# EAGLE board transmitter (EAGLE 7.4.0)
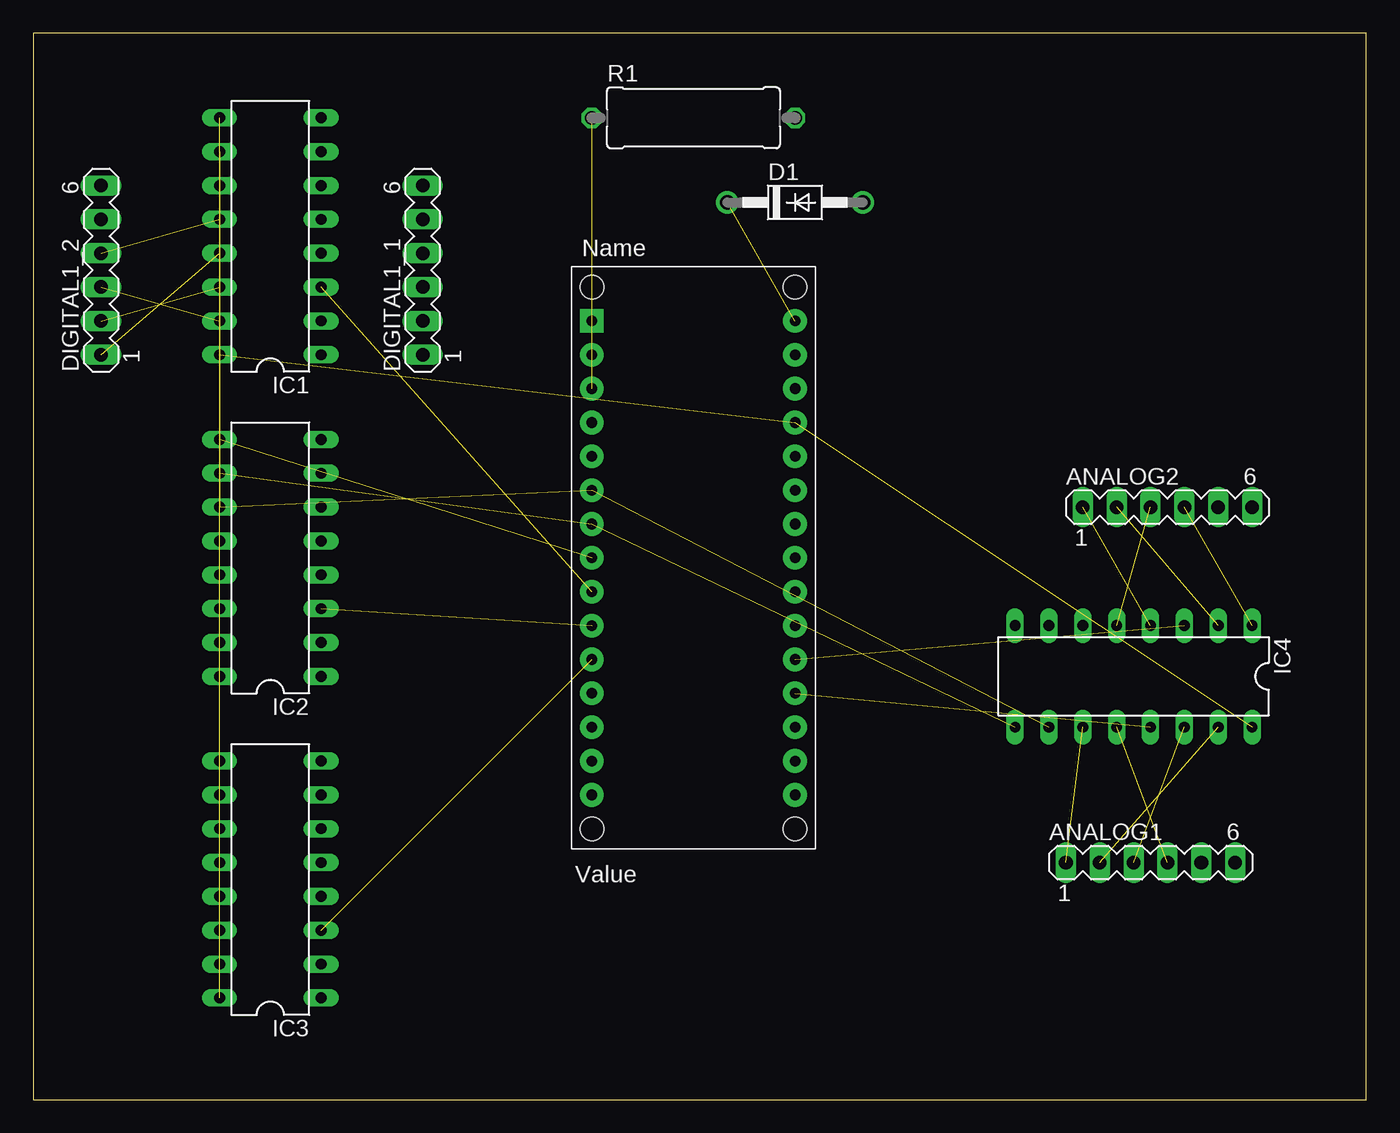
[diagram p0: board, top side]
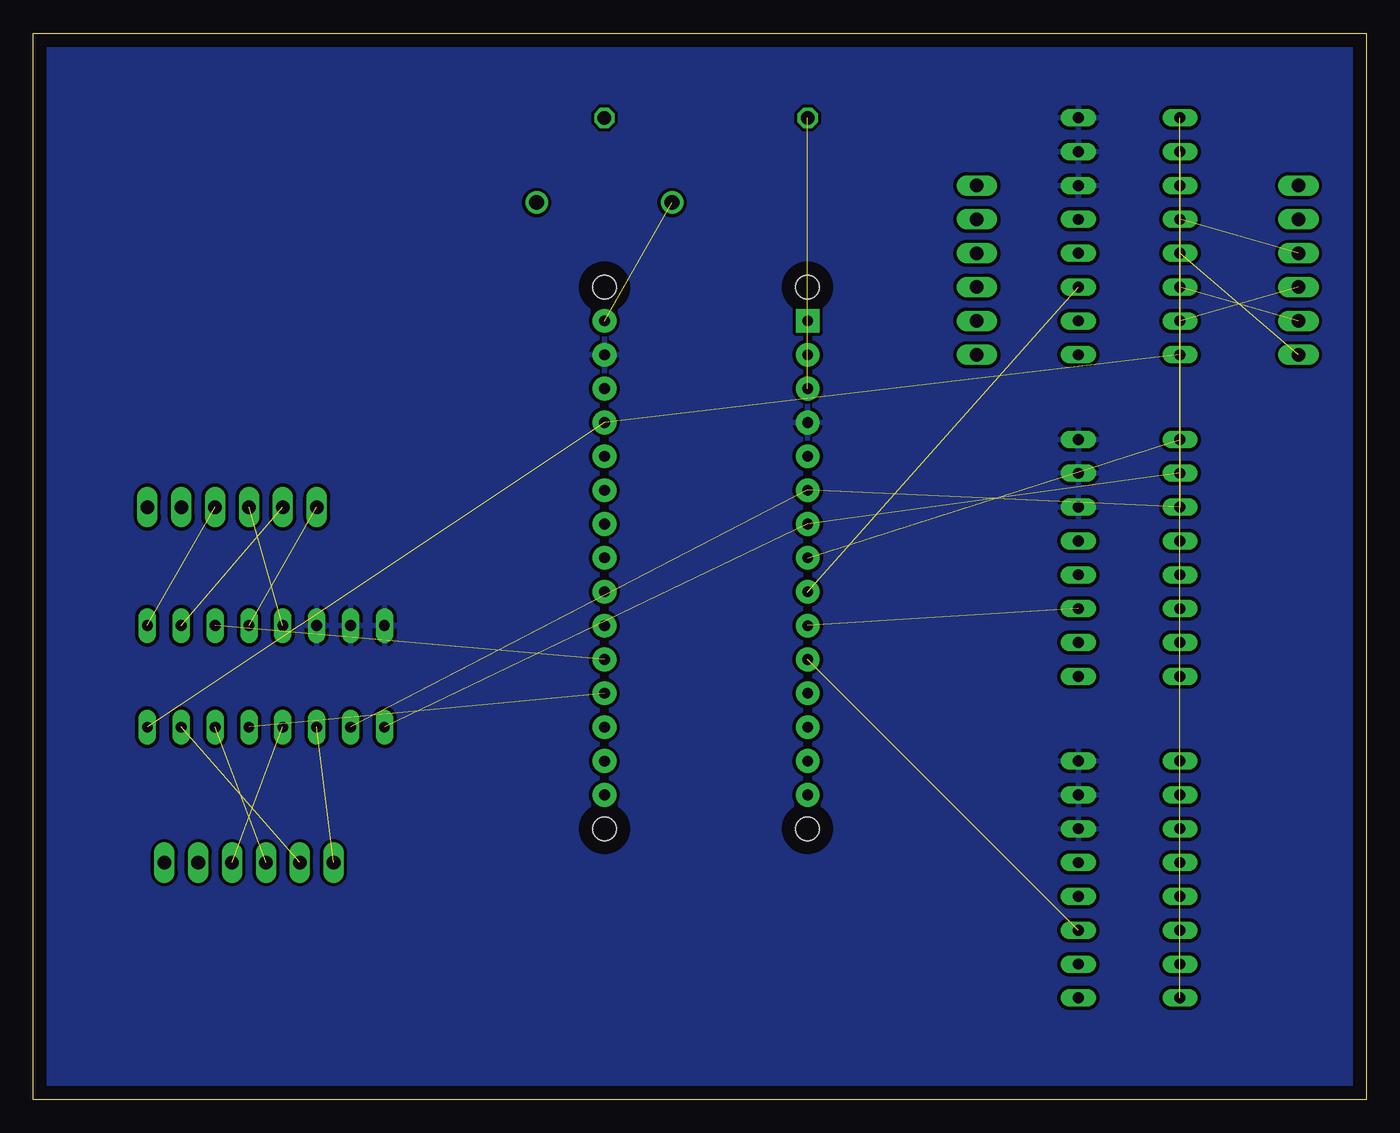
[diagram p1: board, bottom side, seen from below]

Size 100 x 80 mm. Coordinates in mm from the lower left corner, seen from the top.
Outline: 0,0 100,0 100,80 0,80 0,0
Copper layers (1*16): Top 0.035mm / dielectric 1.5mm / Bottom 0.035mm
Design rules "default": minimum track width 10mil, minimum drill 24mil, track to track 8mil, track to pad 8mil, pad to pad 8mil, via to via 8mil, smd to smd 8mil, copper to edge 40mil, drill to drill 8mil, minimum pad ring 10mil, minimum via ring 8mil, stop-mask expansion 4mil, vias tented up to drill 0mil, thermal gap 10mil
Net classes: 0 default: width 1.27 mm, drill 0.25 mm, clearance 0.25 mm

## Footprints (pad centres in the part's own frame; a part is rotated, then mirrored left to right if it is on the bottom)
MA06-1 = drill 1.016 long: 1 -6.35,0; 2 -3.81,0; 3 -1.27,0; 4 1.27,0; 5 3.81,0; 6 6.35,0
DO41-10 = drill 1.118: A 5.08,0; C -5.08,0
DIL16 = drill 0.813 long: 1 -8.89,-3.81; 2 -6.35,-3.81; 3 -3.81,-3.81; 4 -1.27,-3.81; 5 1.27,-3.81; 6 3.81,-3.81; 7 6.35,-3.81; 8 8.89,-3.81; 9 8.89,3.81; 10 6.35,3.81; 11 3.81,3.81; 12 1.27,3.81; 13 -1.27,3.81; 14 -3.81,3.81; 15 -6.35,3.81; 16 -8.89,3.81
P0613/15 = drill 1.016 octagon: 1 -7.62,0; 2 7.62,0
PDIP-32 = drill 0.8 pad 1.778: 3V3 15.24,-35.56; +5V 15.24,-10.16; A0 15.24,-12.7; A1 15.24,-15.24; A2 15.24,-17.78; A3 15.24,-20.32; A4 15.24,-22.86; A5 15.24,-25.4; A6 15.24,-27.94; A7 15.24,-30.48; AREF 15.24,-33.02; D0/RX 0,-5.08; D2 0,-12.7; D3 0,-15.24; D4 0,-17.78; D5 0,-20.32; D6 0,-22.86; D7 0,-25.4; D8 0,-27.94; D9 0,-30.48; D10 0,-33.02; D11 0,-35.56; D12 0,-38.1; D13 15.24,-38.1; GND 0,-10.16; GND1 15.24,-5.08; RESET 0,-7.62; RESET1 15.24,-7.62; VIN 15.24,-2.54 | drill 0.8 pad 1.778 square: D1/TX 0,-2.54 | hole 1.778: 0,0; 0,-40.64; 15.24,-40.64; 15.24,0

## Placement (x,y rotation side)
ANALOG1  [MA06-1]  83.82,17.78 0 top
ANALOG2  [MA06-1]  85.09,44.45 0 top
D1  1N4004  [DO41-10]  57.15,67.31 0 top
DIGITAL1_1  [MA06-1]  29.21,62.23 90 top
DIGITAL1_2  [MA06-1]  5.08,62.23 90 top
IC1  4051N  [DIL16]  17.78,64.77 90 top
IC2  4051N  [DIL16]  17.78,40.64 90 top
IC3  4051N  [DIL16]  17.78,16.51 90 top
IC4  4052N  [DIL16]  82.55,31.75 180 top
R1  [P0613/15]  49.53,73.66 0 top
U$1  ARDUINONANO  [PDIP-32]  41.91,60.96 0 top

## Library data of the parts
ANALOG1 ANALOG2 DIGITAL1_1 DIGITAL1_2 = con-lstb; OC_FARNELL: unknown; OC_NEWARK: unknown
D1 = diode
IC1-IC4 = 40xx
R1 = resistor
U$1 = jet-lib

## Nets
+5V: R1.2
+12V: D1.A
GND: IC1.6 IC1.7 IC1.8 IC2.6 IC2.7 IC2.8 IC3.6 IC3.7 IC3.8 IC4.6 IC4.7 IC4.8 U$1.GND U$1.GND1
N$1: IC4.13 U$1.A7
N$2: IC4.3 U$1.A6
N$3: IC1.11 IC2.11 IC3.11 IC4.10 U$1.D3
N$4: IC1.10 IC2.10 IC3.10 IC4.9 U$1.D4
N$5: IC1.9 IC2.9 IC3.9 U$1.D5
N$6: IC1.3 U$1.D6
N$7: IC2.3 U$1.D7
N$8: IC3.3 U$1.D8
N$9: D1.C U$1.VIN
N$10: R1.1 U$1.RESET
N$11: ANALOG1.4 IC4.12
N$12: ANALOG1.3 IC4.14
N$13: ANALOG1.2 IC4.15
N$14: ANALOG1.1 IC4.11
N$15: ANALOG2.4 IC4.1
N$16: ANALOG2.3 IC4.5
N$17: ANALOG2.2 IC4.2
N$18: ANALOG2.1 IC4.4
N$19: DIGITAL1_2.1 IC1.13
N$20: DIGITAL1_2.2 IC1.14
N$21: DIGITAL1_2.3 IC1.15
N$22: DIGITAL1_2.4 IC1.12
VDD: IC1.16 IC2.16 IC3.16 IC4.16 U$1.+5V

## Tracks (layer width: path | path; a pad name or v marks a point on that pad's centre or on a via)
GND
  pour Bottom: 0,80.01 100.33,80.01 100.33,0 0,0
N$1  (1 unrouted)
N$2  (1 unrouted)
N$3  (4 unrouted)
N$4  (4 unrouted)
N$5  (3 unrouted)
N$6  (1 unrouted)
N$7  (1 unrouted)
N$8  (1 unrouted)
N$9  (1 unrouted)
N$10  (1 unrouted)
N$11  (1 unrouted)
N$12  (1 unrouted)
N$13  (1 unrouted)
N$14  (1 unrouted)
N$15  (1 unrouted)
N$16  (1 unrouted)
N$17  (1 unrouted)
N$18  (1 unrouted)
N$19  (1 unrouted)
N$20  (1 unrouted)
N$21  (1 unrouted)
N$22  (1 unrouted)
VDD  (4 unrouted)